# Altium PCB PCB1.PcbDoc
Units mm, origin at the board's own origin, x right, y up, seen from the top; angles counter-clockwise.
Board outline 90 x 120 mm, 2 copper layers (Top Layer, Bottom Layer); 34 components, 26 nets, 108 pads, 52 vias.
Unrouted connection lines stored in the file: 10.
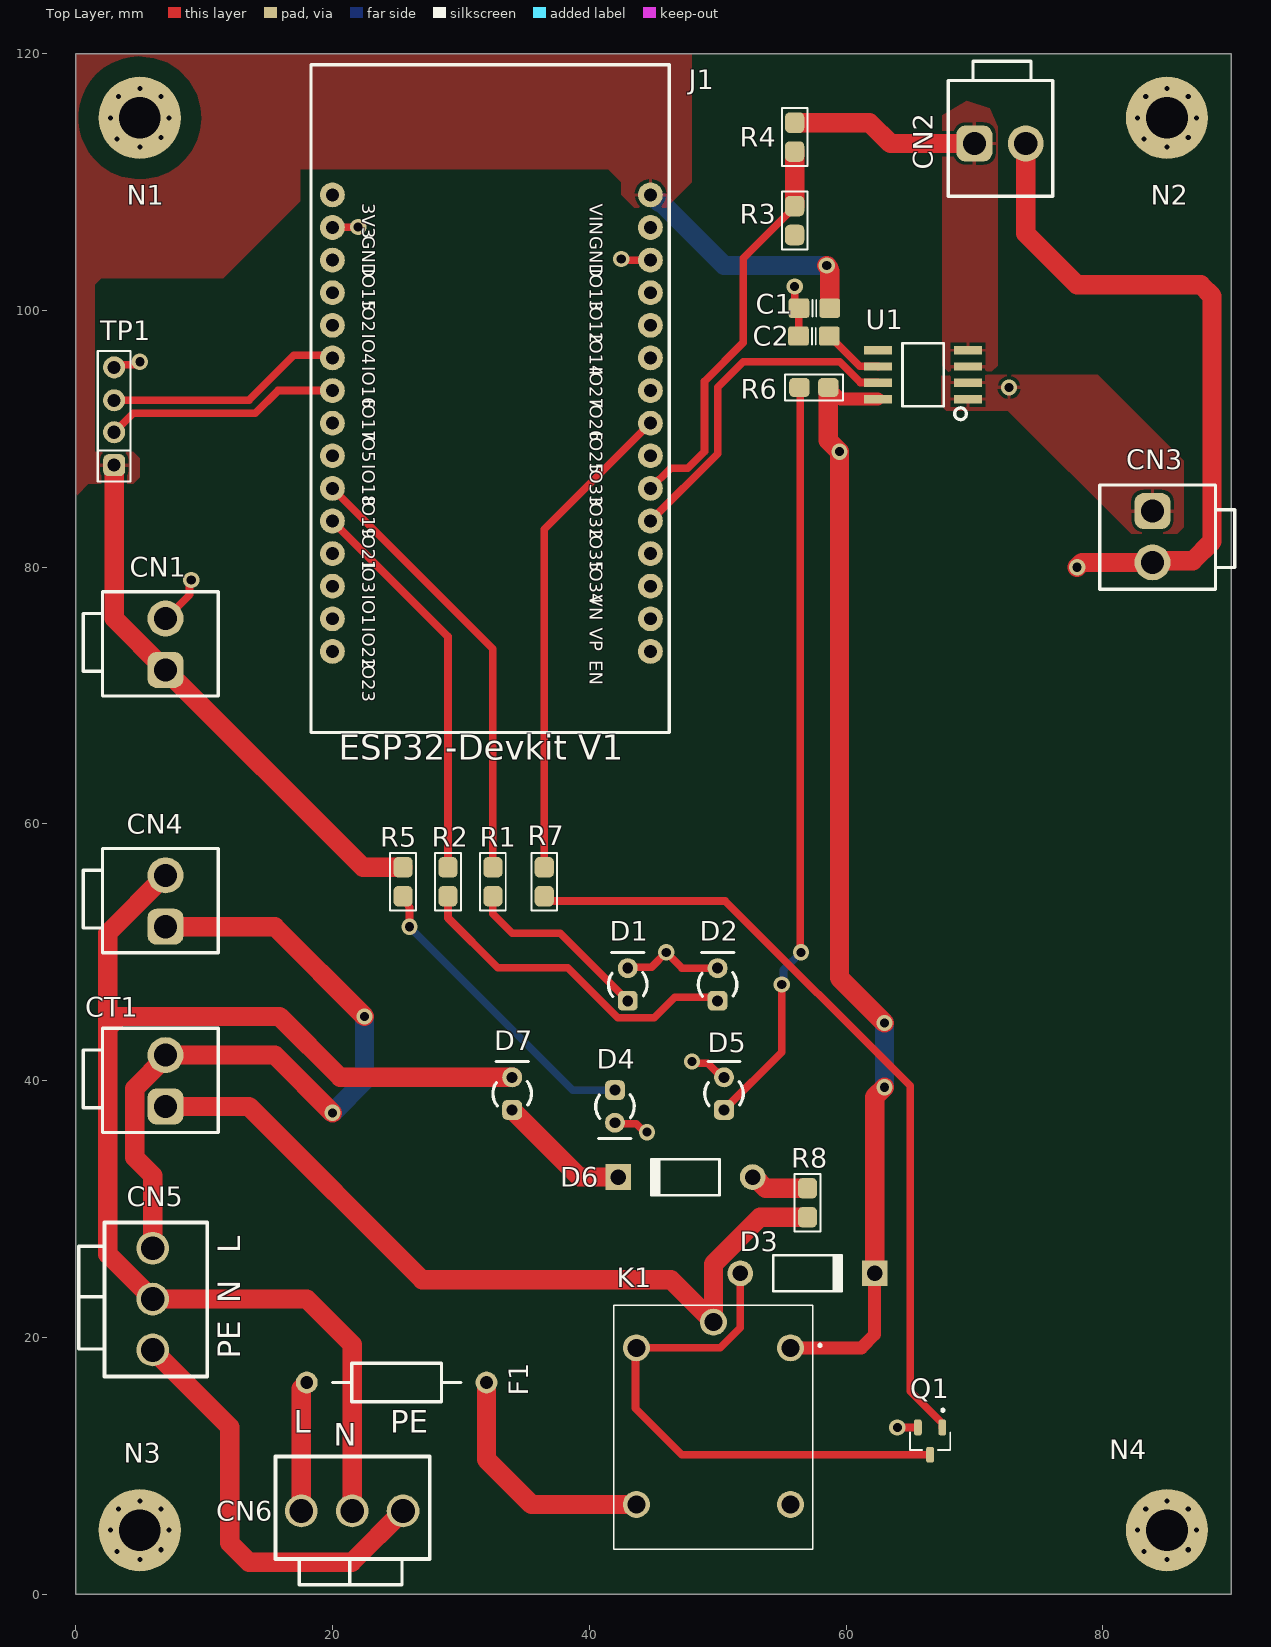
[diagram p0: Top Layer view]
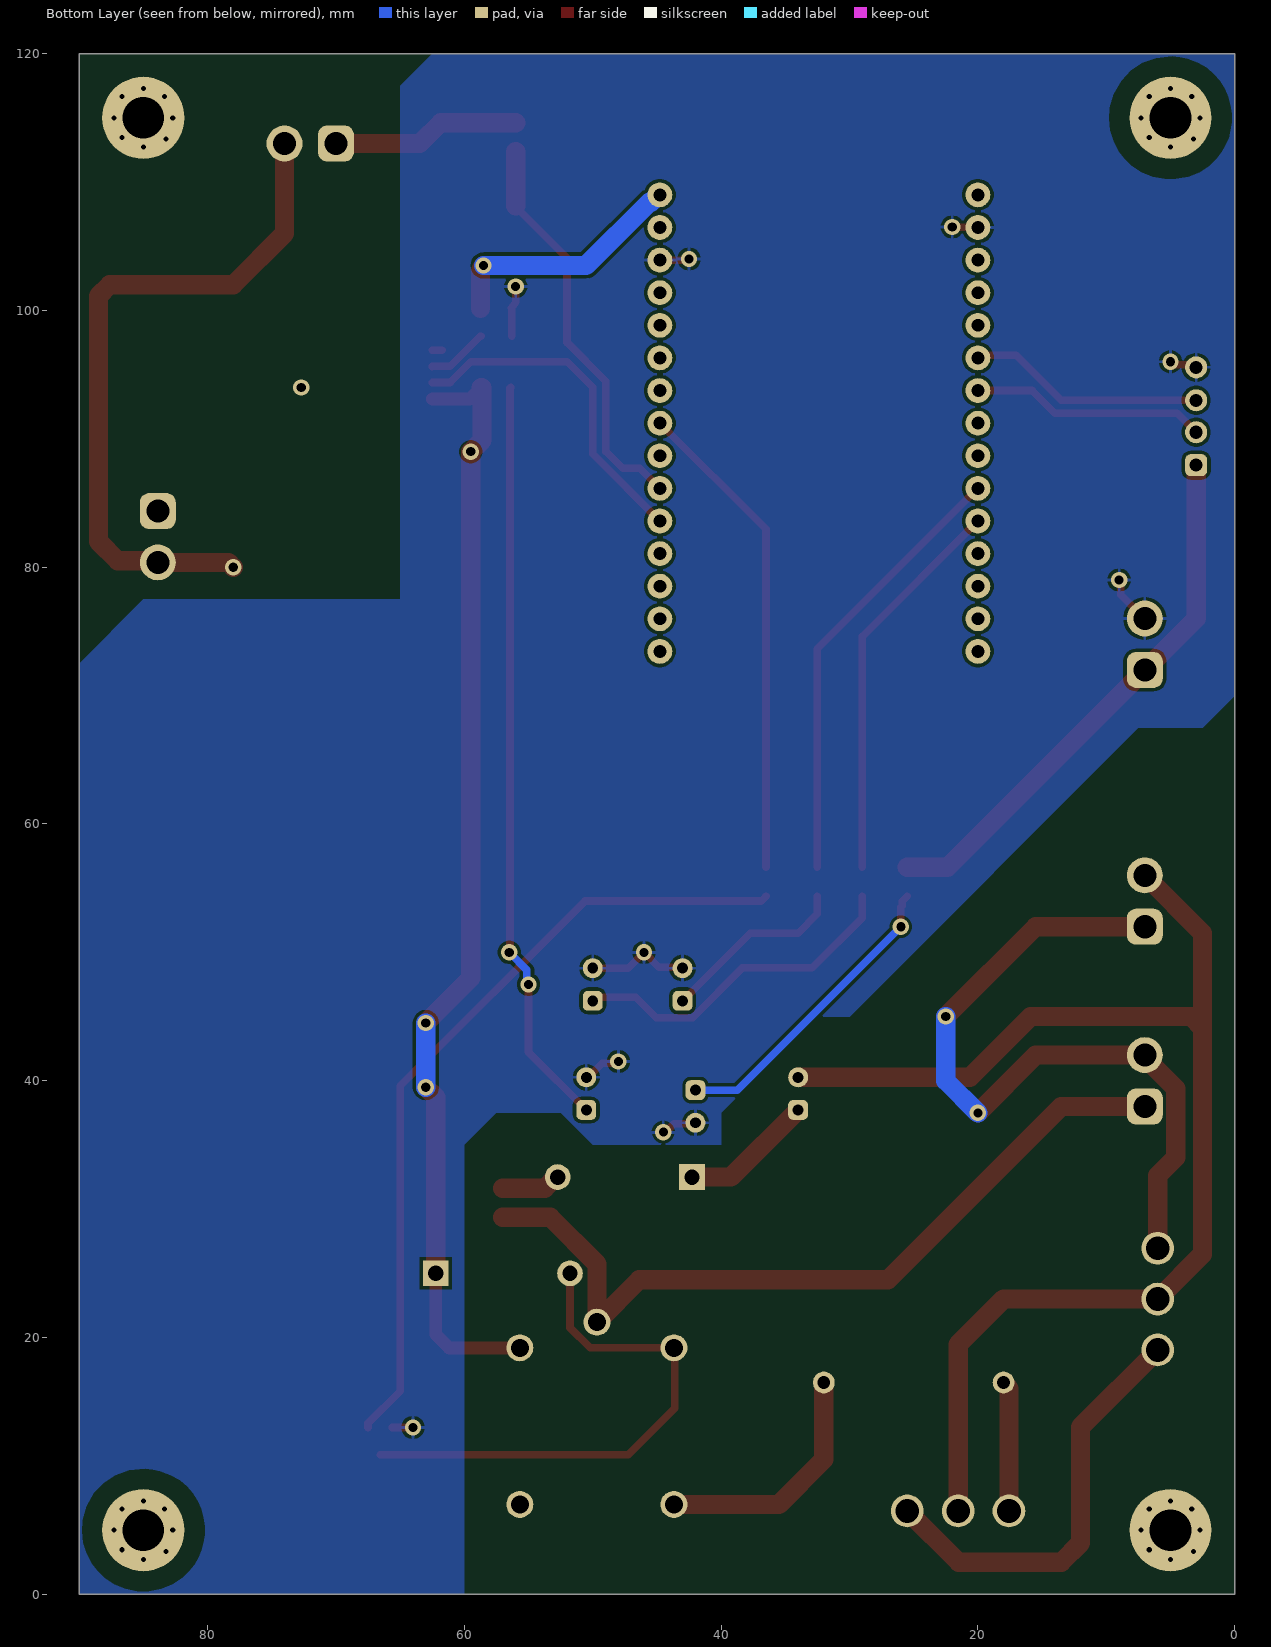
[diagram p1: Bottom Layer view, seen from below]

## Layer stack, top to bottom
Top Solder: solder mask 1, Solder Resist, Dk 3.5
Top Layer: signal copper 0.0356
Dielectric 1: dielectric 0.32, FR-4, Dk 4.8
Bottom Layer: signal copper 0.0356
Bottom Solder: solder mask 1, Solder Resist, Dk 3.5

## Board outline
0,0 90,0 90,120 0,120

## Design rules (kind name [scope] priority, off if disabled: settings)
Clearance [All] p1: gap=0.254 ignorepadtopadclearanceinfootprint=FALSE except(0: Arc-Hole Track-Hole SMDPad-Hole THPad-Hole Via-Hole Fill-Hole Poly-Hole Region-Hole Text-Hole)
Height [All] p1: minheight=0 maxheight=100 prefheight=12.7
PolygonConnect [All] p1: connectstyle=Relief reliefconductorwidth=0.254 reliefentries=4 polygonreliefangle="90 Angle" airgapwidth=0.254
RoutingVias [All] p1: holewidth=0.711 width=1.27 viastyle="Through Hole" minholewidth=0.711 minwidth=1.27 maxholewidth=0.711 maxwidth=1.27
SolderMaskExpansion [All] p1: expansion=0.102 istentingtop=FALSE
Width Width_1 [All] p1: maxlimit=1.5 minlimit=0.254 preferedwidth=0.254 minimp=50.000000 maximp=50.000000 favimp=50.000000
Width [All] p2: maxlimit=0.596 minlimit=0.555 preferedwidth=0.576
29 further rules are at their usual default settings.

## Components (designator, comment, footprint, x,y, rotation, side; value= is the part's Value field where it differs from the comment)
C1 "100n" CAPC2012X135N 57.538,100.177 r0 top
C2 "100n" CAPC2012X135N 57.5,98 r180 top
CN1 "V_SUPPLY" "Header 2 pin molex" 7,72 r90 top
CN2 "V_BAT_OUT" "Header 2 pin molex" 70,113 r0 top
CN3 "V_BAT_IN" "Header 2 pin molex" 83.873,84.373 r270 top
CN4 "PZEM_DATA" "Header 2 pin molex" 7,52 r90 top
CN5 "EMER BOARD" "CON 3P 3.8mm" 6,26.96 r270 top
CN6 "Connector" "CON 3P 3.8mm" 17.58,6.499 r0 top
CT1 "CT" "Header 2 pin molex" 7,38 r90 top
D1 "LED" "LED GREEN" 43,47.5 r0 top
D2 "LED" "LED GREEN" 50,47.5 r0 top
D3 "Diode 1N4007" DO-41 57,25 r0 top
D4 "LED" "LED GREEN" 42,38 r180 top
D5 "LED" "LED GREEN" 50.5,39 r0 top
D6 "Diode 1N4007" DO-41 47.5,32.5 r180 top
D7 "LED_AC" "LED ORANGE" 34,39 r0 top
F1 "36FG(L)R" "Micro Fuse - L14mm" 25,16.5 r0 top value="1A, 250Vac"
J1 "ESP32DEVKITV1" ESP32-DEVKITV1_3D 33.54,86.13 r270 top
K1 "HRS4-S_DC6V" HRS4SDC5V 50,13 r270 top
N1 "M3" "M3 hole" 5,115 r0 top
N2 "M3" "M3 hole" 85,115 r0 top
N3 "M3" "M3 hole" 5,5 r0 top
N4 "M3" "M3 hole" 85,5 r0 top
Q1 "MMBT2222ALT1G" SOT95P237X111-3N 66.55,11.94 r270 top
R1 "220" "0805 Modificado" 32.5,55.5 r270 top
R2 "220" "0805 MODIFICADO" 29,55.5 r270 top
R3 "7K5" "0805 MODIFICADO" 56,107 r270 top
R4 "30K" "0805 MODIFICADO" 56,113.5 r270 top
R5 "220" "0805 MODIFICADO" 25.5,55.5 r90 top
R6 "100K" "0805 Modificado" 57.5,94 r180 top
R7 "5k" "0805 MODIFICADO" 36.5,55.5 r270 top
R8 "56k" "0805 MODIFICADO" 57,30.5 r90 top
TP1 "TEST" "1x4P Test PIN" 3,90.485 r90 top
U1 "ACS712ELCTR-05B-T" SOIC127P600X175-8N 66,95 r180 top

## Footprints (in the part's own frame and the unit in brackets; to place one, negate y for a bottom-side part, rotate by r counter-clockwise, add the part's x,y. Pads: shape width x height; smd on the part's side, far side on the other; paste and mask are expansions set on the pad)
"1x4P Test PIN" [mm] "Connector Header, Single-row 4-position, 0.100\" pitch"
  rrect50% 1.72x1.72 hole 1.02: 1(-2.54,0)
  round 1.72 hole 1.02: 2(0.025,0) 3(2.515,0) 4(5.08,0)
  silkscreen extent -3.81,-1.27 6.35,1.27, body extent -3.69,-1.15 6.23,1.15, height 5
"0805 Modificado" [mm] "Chip Resistor, Empaque 0805"
  rrect50% 1.6x1.5 smd: 1(-1.125,0) 2(1.125,0)
  silkscreen extent -2.25,-1 2.25,1, body extent -1,-0.62 1,0.62, height 0.78
"0805 MODIFICADO" [mm] "Chip Resistor, Empaque 0805"
  rrect50% 1.6x1.5 smd: 1(-1.125,0) 2(1.125,0)
  silkscreen extent -2.25,-1 2.25,1, body extent -1,-0.62 1,0.62, height 0.78
CAPC2012X135N [mm] "Chip Capacitor, Body 2.0x1.2mm, EIA 0805, IPC Medium Density"
  round 0.254 on Mech15: 0(0,0)
  rrect25% 1.6x1.5 smd: 1(-1.2,0) 2(1.2,0)
  Top Layer pour cut-out: -0.675,0.7 -0.475,0.9 0.475,0.9 0.675,0.7 0.675,-0.7 0.475,-0.9 -0.475,-0.9 -0.675,-0.7
  silkscreen extent -0.15,-0.65 0.15,0.65, body extent -1.1,-0.72 1.1,0.73, height 1.34
"CON 3P 3.8mm" [mm]
  round 2.55 hole 1.85: 1(0,0) 2(3.96,0)
  round 2.55 hole 1.85 copper offset 0,0: 3(7.92,0.001)
  silkscreen extent -2,-5.76 10,4.25, body extent -1.86,-5.5 9.9,4, height 14.4
DO-41 [mm] "Diode, Axial; Body 5.2 x 2.7 mm (LxDia. max), Lead Dia. 0.86 mm (max)"
  round 2 hole 1.2: 1(-5.23,0)
  rect 2x2 hole 1.2: 2(5.23,0)
  silkscreen extent -2.65,-1.4 2.75,1.4, body extent -5.51,-1.34 5.51,1.4, height 2.73
ESP32-DEVKITV1_3D [mm]
  round 1.93 hole 1: 1(-22.87,-13.54) 2(-20.33,-13.54) 3(-17.79,-13.54) 4(-15.25,-13.54) 5(-12.71,-13.54) 6(-10.17,-13.54) 7(-7.63,-13.54) 8(-5.09,-13.54) 9(-2.55,-13.54) 10(-0.01,-13.54) 11(2.53,-13.54) 12(5.07,-13.54) 13(7.61,-13.54) 14(10.15,-13.54) 15(12.69,-13.54) 16(12.69,11.23) 17(10.15,11.23) 18(7.61,11.23) 19(5.07,11.23) 20(2.53,11.23) 21(-0.01,11.23) 22(-2.55,11.23) 23(-5.09,11.23) 24(-7.63,11.23) 25(-10.17,11.23) 26(-12.71,11.23) 27(-15.25,11.23) 28(-17.79,11.23) 29(-20.33,11.23) 30(-22.87,11.23)
  silkscreen extent -33,-15.2 19,12.7, body extent -33,-15.14 17.93,13.36, height 12.75
"Header 2 pin molex" [mm]
  rrect50% 2.8x2.8 hole 1.8: 1(0,0)
  round 2.8 hole 1.8: 2(4,0)
  silkscreen extent -2.03,-4.11 6.1,6.4, body extent -1.9,-3.95 5.9,5.55, height 14.4
HRS4SDC5V [mm]
  round 2.1 hole 1.4: 1(-6.2,5.675) 2(6,5.675) 3(6,-6.325) 4(-6.2,-6.325) 5(-8.2,-0.325)
  silkscreen extent -9.5,-8.08 9.5,8.07, body extent -9.5,-8.08 9.5,7.42, height 16.1
"LED GREEN" [mm]
  round 1.55 hole 0.85: 1(0,1.27)
  rrect50% 1.55x1.55 hole 0.85: 2(0,-1.27)
  silkscreen extent -1.5,-0.94 1.5,2.5, body extent -1.65,-1.66 1.65,1.64, height 7.01
"LED ORANGE" [mm]
  round 1.55 hole 0.85: 1(0,1.27)
  rrect50% 1.55x1.55 hole 0.85: 2(0,-1.27)
  silkscreen extent -1.5,-0.94 1.5,2.5, body extent -1.64,-1.66 1.65,1.55, height 6.48
"M3 hole" [mm]
  round 6.4 hole 3.25 mask+1.5: M(0,0)
  Top Layer pour cut-out: -0.132,4.78 -0.737,4.724 -1.295,4.597 -2.108,4.293 -2.818,3.885 -3.378,3.404 -3.834,2.869 -4.229,2.248 -4.497,1.616 -4.674,0.984 -4.769,0.305 -4.769,-0.353 -4.674,-0.965 -4.521,-1.575 -4.267,-2.134 -3.962,-2.692 -3.569,-3.175 -3.023,-3.721 -2.261,-4.229 -1.397,-4.572 -0.406,-4.75 0.457,-4.75 1.372,-4.572 2.248,-4.229 3.01,-3.721 3.556,-3.175 4.013,-2.591 4.42,-1.803 4.674,-0.965 4.775,-0.076 4.724,0.787 4.42,1.854 3.81,2.896 3.048,3.708 2.159,4.293 1.092,4.648
  Bottom Layer pour cut-out: -0.132,4.78 -0.737,4.724 -1.295,4.597 -2.108,4.293 -2.818,3.885 -3.378,3.404 -3.834,2.869 -4.229,2.248 -4.497,1.616 -4.674,0.984 -4.769,0.305 -4.769,-0.353 -4.674,-0.965 -4.521,-1.575 -4.267,-2.134 -3.962,-2.692 -3.569,-3.175 -3.023,-3.721 -2.261,-4.229 -1.397,-4.572 -0.406,-4.75 0.457,-4.75 1.372,-4.572 2.248,-4.229 3.01,-3.721 3.556,-3.175 4.013,-2.591 4.42,-1.803 4.674,-0.965 4.775,-0.076 4.724,0.787 4.42,1.854 3.81,2.896 3.048,3.708 2.159,4.293 1.092,4.648
  body extent -2.81,-2.8 2.79,2.8, height 4.92
"Micro Fuse - L14mm" [mm]
  round 1.7 hole 1: 1(-7,0) 2(7,0)
  silkscreen extent -5,-1.5 5,1.5, body extent -6.8,-1.9 6.8,1.9, height 3.9
SOIC127P600X175-8N [mm]
  rect 2.2x0.65 smd: 1(-3.5,1.905) 2(-3.5,0.635) 3(-3.5,-0.635) 4(-3.5,-1.905) 5(3.5,-1.905) 6(3.5,-0.635) 7(3.5,0.635) 8(3.5,1.905)
  silkscreen extent -3.38,-2.45 1.6,3.51, body extent -3,-2.45 3,2.45, height 1.75
SOT95P237X111-3N [mm]
  rrect50% 1.23x0.6 smd: 1(-1.06,0.95) 2(-1.06,-0.95) 3(1.06,0)
  silkscreen extent -2.5,-1.56 0.7,1.56, body extent -1.2,-1.45 1.2,1.45, height 0.91

## Part data
CN1 CN2 CN3 CN4 CT1: library part "Header LIGHT", "Connector 3.96MM 02 PIN WAFER STRAIGHTPIN (MALE)"
CN5 CN6: library part "Con 112002ST/RH 3.96mm 2P V-PLUG_1", "Connector 3.9mm. 3PINS WAFER STRAIGHT PIN (MALE)", Manufacturer=GTK, MPN=112002ST/RH, RMPN=RMELCCNT006, ComponentLink1Description="ES LINK", ComponentLink1URL=https://www.es.co.th/detail.asp?Prod=000709322, ESPN=0007-0932-2, M DESC="WAFER Connector 2 Pins,Pitch 3.96mm, Straight Type", RM DESC="Connector 3.9mm. 2PINS WAFER STRAIGHT PIN (MALE)"
D1 D2 D4 D5: library part "LED GREEN", "LED Lamp Round 5 mm, 50 mcd,Green Color Green Diffused Lens"
D3 D6: library part "Diode 1N4001", "1 Amp General Purpose Rectifier", Code_JEDEC=DO-204-AL, ComponentLink1Description="Manufacturer Link", ComponentLink1URL=http://www.fairchildsemi.com/, ComponentLink2Description=Datasheet, ComponentLink2URL=http://www.fairchildsemi.com/ds/1N%2F1N4001.pdf, DatasheetVersion=1998, LatestRevisionDate=17-Jul-2002, LatestRevisionNote="Re-released for DXP Platform.", PackageDescription="Diode, Axial; Body 5.2 x 2.7 mm (LxDia. max), Lead Dia. 0.86 mm (max)", PackageReference=DO-41, PackageVersion=Aug-1999, Published=8-Jun-2000, Publisher="Altium Limited"
D7: library part "LED ORANGE", "LED ORANGE for AC-signal display"
F1: library part "Fuse 36FG(L)R 1A On pcb", "Fuse Microfuse, 1A/250Vac, Fast Acting (Normal Blow) P/N : 36FG(L)R (SLEEK)", Manufacturer=SLEEK, RMPN=RMELCFUSA001, ComponentLink1Description="Link ES", ComponentLink1URL=https://www.es.co.th/detail.asp?prod=056200010, ComponentLink2Description=Datasheet, ComponentLink2URL=https://www.es.co.th/Schemetic/PDF/36FG-SLEEK.PDF, ESPN=0562-0001-0, MPN=36FG(L)R, Published=14-May-2014, Publisher="Cynetik Group", Revised="Zion Blue", RM DESC="Fuse หางหนู Microfuse, 1A/250Vac, Fast Acting (Normal Blow) P/N : 36FG(L)R (SLEEK)"
J1: "Dual core, Wi-Fi: 2.4 GHz up to 150 Mbits/s,BLE (Bluetooth Low Energy) and legacy Bluetooth, 32 bits, Up to 240 MHz", Package=Package, Availability=Unavailable, Check_prices=https://www.snapeda.com/parts/ESP32%20DEVKIT%20V1/Do%20it/view-part/5659245/?ref=eda, MF="Do it", MP="ESP32 DEVKIT V1", Price=None, SnapEDA_Link=https://www.snapeda.com/parts/ESP32%20DEVKIT%20V1/Do%20it/view-part/5659245/?ref=snap
K1: library part HRS4-S_DC5V, "Relay or Contactor", Manufacturer_Name=MULTICOMP, Manufacturer_Part_Number="HRS4-S DC5V", Datasheet Link=http://www.farnell.com/datasheets/1306711.pdf, Height=16mm
N1 N2 N3 N4: library part "M3 hole", "น็อต JT หัวร่ม สกรูมิลสี่แฉก M3x6", RMPN=RMRMANUTCJTZ011
Q1: "Bipolar (BJT) Transistor NPN 40 V 600 mA 300MHz 225 mW Surface Mount SOT-23-3 (TO-236)", Package="SOT-23-3 ON Semiconductor", Availability="In Stock", Check_prices=https://www.snapeda.com/parts/MMBT2222ALT1G/Onsemi/view-part/?ref=eda, MF="ON Semiconductor", MP=MMBT2222ALT1G, Price=None, Purchase-URL=https://pricing.snapeda.com/search/part/MMBT2222ALT1G/?ref=eda, SnapEDA_Link=https://www.snapeda.com/parts/MMBT2222ALT1G/Onsemi/view-part/?ref=snap
R3 R4 R8: library part 5k
R6: library part "Resistor 0805 SMD 4K7 OHM +/- 1% (CHIP)", "'RES SMD 4.7K OHM 1% 1/8W 0805/0805W8F4701T5E"
TP1: library part "PIN Header 1X4", "Connector Pin Header 4 Pins,Pitch 2.54mm. P/N : PHSS04G10/RH (GTK)", ComponentLink1Description="Link ES", ComponentLink1URL=https://www.es.co.th/detail.asp?Prod=000703471, ComponentLink2Description=Datasheet, ComponentLink2URL=https://www.es.co.th/Schemetic/PDF/PHSSXXG10.PDF
U1: "Current Sensor 5A 1 Channel Hall Effect, Open Loop Bidirectional 8-SOIC (0.154, 3.90mm Width)", Package="SOIC-8 Allegro MicroSystems LLC", Availability="In Stock", Check_prices=https://www.snapeda.com/parts/ACS712ELCTR-05B-T/Allegro+MicroSystems+LLC/view-part/?ref=eda, MF="Allegro MicroSystems LLC", MP=ACS712ELCTR-05B-T, Price=None, Purchase-URL=https://pricing.snapeda.com/search/part/ACS712ELCTR-05B-T/?ref=eda, SnapEDA_Link=https://www.snapeda.com/parts/ACS712ELCTR-05B-T/Allegro+MicroSystems+LLC/view-part/?ref=snap
R1 R2 R5: LatestRevisionDate=17-Jul-2002, LatestRevisionNote="Re-released for DXP Platform.", PackageReference=AXIAL-0.3, Published=8-Jun-2000, Publisher="Altium Limited"

## Via types
v1: diameter 0.8, hole 0.4, Top Layer to Bottom Layer, 32 vias
v2: diameter 1.27, hole 0.711, Top Layer to Bottom Layer, 20 vias

## Nets (pads, with @x,y where several pads share a name; then routed paths per layer and width w, separated by ;. In a path a pad name is that pad's centre, name@x,y a point inside that pad or via, vN(x,y) a via of type N, cw(c..) or ccw(c..) an arc to the next point about the centre after c; other vN are vias at no path point)
5: C1.2 CN1.1 D3.2 J1.30 K1.1 R5.2 R6.1 TP1.1 U1.8 | length 149
  Top Layer w1: K1.1 61.2,19.2 62.23,20.23 D3.2 ; R6.1@58.675,94 59.58,93.095 U1.8
  Top Layer w1.5: TP1.1 3,76 CN1.1 22.375,56.625 R5.2 ; v2(58.5,103.5) cw(c57.926,102.926) 58.738,102.926 C1.2 ; R6.1@58.675,94 R6.1 58.625,89.875 v2(59.5,89) 59.5,48 v2(63,44.5) ; D3.2 62.23,38.73 v2(63,39.5)
  Bottom Layer w1.5: J1.30 44.886,109 45.457,108.429 45.586,108.429 50.515,103.5 v2(58.5,103.5) ; v2(63,39.5) v2(63,44.5)
"AC LINE INPUT": F1.2 K1.3 | length 19.1
  Top Layer w1.5: F1.2 32,10.5 35.5,7 K1.3
"AC LINE OUTPUT": CN4.1 CN5.1 CT1.2 | length 58.5
  Top Layer w1.5: CN5.1 6,32.623 4.596,34.027 4.596,39.406 7,41.81 CT1.2@7,41.905 ; CT1.2 CT1.2@7,41.905 ; CN4.1 15.5,52 v2(22.5,45) ; v2(20,37.5) 15.5,42 7.095,42 CT1.2@7,41.905
  Bottom Layer w1.5: v2(20,37.5) 22.5,40 v2(22.5,45)
"AC NEUTRAL INPUT": CN4.2 CN5.2 CN6.2 D7.1 | length 100.1
  Top Layer w1.5: CN4.2 2.5,51.5 2.5,44.121 ; CN6.2 21.54,19.46 18,23 CN5.2 2.5,26.5 2.5,44.121 ; D7.1 20.608,40.27 15.878,45 3.379,45 2.5,44.121
CURRENT_SENSOR: J1.20 U1.7 | length 26.6
  Top Layer w0.596: J1.20 50,88.83 50,94 52,96 59.5,96 61.108,94.392 62.473,94.392 U1.7
GND: C1.1 C2.2 CN1.2 CN2.2 CN3.2 D1.1 D2.1 D4.1 D5.1 J1.2 J1.28 Q1.2 R3.2 TP1.4 U1.5 | length 84.5
  Top Layer w0.596: TP1.4 3.215,95.78 4.598,95.78 4.818,96 v2(5,96) ; CN1.2 8.871,77.871 8.871,78.871 v2(9,79) ; J1.2 20.02,106.48 21.98,106.48 v2(22,106.5) ; D4.1 42.081,36.649 43.669,36.649 44.318,36 v2(44.5,36) ; v2(42.5,104) 42.58,103.92 J1.28 ; D1.1 43.081,48.851 44.851,48.851 v2(46,50) 47.23,48.77 D2.1 ; v2(48,41.5) 48.129,41.371 49.241,41.371 50.342,40.27 D5.1 ; v2(56,101.861) 56,100.629 C1.1 56.319,100.159 56.319,98.019 C2.2 ; U1.5@61.725,96.905 U1.5 ; v2(64,13) Q1.2
  Top Layer w1.5: CN2.2 74,106 78,102 87.621,102 88.5,101.121 88.5,82 87,80.5 84,80.5 CN3.2 78.373,80.373 v2(78,80)
IP+: CN3.1 U1.1 U1.2
  other v2: 72.7,94
IP-: CN2.1 R4.1 U1.3 U1.4 | length 14.7
  Top Layer w1.5: R4.1 61.838,114.625 63.462,113 CN2.1
"IV LED": J1.11 R2.1 | length 30.7
  Top Layer w0.596: J1.11 29,74.6 R2.1
NetC2_1: C2.1 U1.6 | length 4.8
  Top Layer w0.596: C2.1 58.75,98 61.088,95.662 62.473,95.662 U1.6
NetCN6_1: CN6.1 F1.1 | length 10.2
  Top Layer w1.5: CN6.1 17.58,16.026 18,16.446 F1.1
NetCT1_1: CT1.1 K1.5 R8.1 | length 63
  Top Layer w1.5: CT1.1 13.5,38 27,24.5 46.375,24.5 K1.5 49.675,25.739 53.311,29.375 R8.1
NetD1_2: D1.2 R1.2 | length 14.7
  Top Layer w0.596: R1.2 32.5,53 34,51.5 37.73,51.5 D1.2
NetD2_2: D2.2 R2.2 | length 26.7
  Top Layer w0.596: R2.2 29,52.681 32.889,48.792 38.334,48.792 42.223,44.903 45.063,44.903 46.66,46.5 49.73,46.5 D2.2
NetD3_1: D3.1 K1.4 Q1.3 | length 42.2
  Top Layer w0.596: D3.1 51.77,20.77 50.2,19.2 K1.4 43.6,19.125 43.6,14.5 47.22,10.88 Q1.3
NetD4_2: D4.2 R5.1 | length 23.9
  Top Layer w0.596: R5.1 25.904,53.971 25.904,53.625 26,53.529 v2(26,52)
  Bottom Layer w0.596: v2(26,52) 38.73,39.27 D4.2
NetD5_2: D5.2 R6.2 | length 58.8
  Top Layer w0.596: D5.2 55,42.23 v2(55,47.5) ; R6.2 56.437,93.938 56.437,50.062 v2(56.5,50)
  Bottom Layer w0.596: v2(55,47.5) 55.129,47.629 55.129,48.629 v2(56.5,50)
NetD6_1: D6.1 R8.2 | length 4.6
  Top Layer w1.5: D6.1 52.865,32.5 53.74,31.625 R8.2
NetD6_2: D6.2 D7.2 | length 10.4
  Top Layer w1.5: D7.2 39.23,32.5 D6.2
NetQ1_1: Q1.1 R7.2 | length 62.3
  Top Layer w0.596: R7.2 36.875,54 50.6,54 65,39.6 65,15.815 67.5,13.315 Q1.1
PE: CN5.3 CN6.3 | length 33.3
  Top Layer w1.5: CN5.3 12,13.041 12,4 13.5,2.5 21.5,2.5 CN6.3
RELAY_CONTROL: J1.23 R7.1 | length 38
  Top Layer w0.596: R7.1 36.5,82.95 J1.23
RX_PZEM: J1.6 TP1.3 | length 18.5
  Top Layer w0.596: TP1.3 13.5,93 17,96.5 19.8,96.5 J1.6
TX_PZEM: J1.7 TP1.2 | length 18.3
  Top Layer w0.596: TP1.2 4.489,92 14,92 15.76,93.76 J1.7
VOLTAGE_SENSOR: J1.21 R3.1 R4.2 | length 31.7
  Top Layer w0.596: J1.21 46.336,87.706 47.674,87.706 48.984,89.016 48.984,94.484 52,97.5 52,104.075 56,108.075 R3.1
  Top Layer w1.5: R3.1 R4.2
WIFI_LED: J1.10 R1.1 | length 34.7
  Top Layer w0.596: J1.10 32.5,73.64 R1.1
pads on no net: C1.0 C2.0 J1.1 J1.3 J1.4 J1.5 J1.8 J1.9 J1.12 J1.13 J1.14 J1.15 J1.16 J1.17 J1.18 J1.19 J1.22 J1.24 J1.25 J1.26 J1.27 J1.29 K1.2 N1.M N2.M N3.M N4.M
copper on no net:
  other v1: 5,2.714 85,2.714 3.222,3.349 83.222,3.349 6.651,3.476 86.651,3.476 2.714,5 7.286,5 82.714,5 87.286,5 3.349,6.651 6.651,6.651 83.349,6.651 86.651,6.651 5,7.286 85,7.286 5,112.714 85,112.714 3.222,113.349 83.222,113.349 6.651,113.476 86.651,113.476 2.714,115 7.286,115 82.714,115 87.286,115 3.349,116.651 6.651,116.651 83.349,116.651 86.651,116.651 5,117.286 85,117.286

## Polygon pours and split planes (outlines as drawn)
5 on Top Layer "5_L01_P007" (solid, pour order 7): 0,85.5 1,86.5 4.5,86.5 5,87 5,88.5 4.5,89 1.5,89 1.5,102 2,102.5 11.5,102.5 17.5,108.5 17.5,111 41.5,111 42.5,110 42.5,109 43.5,108 46,108 48,110 48,120 0,120
IP- on Top Layer "IP-_L01_P002" (solid, pour order 2): 71.3,95.2 71.8,95.7 71.8,114.3 71.203,115.732 69.417,116.328 67.5,115.2 67.5,95.7 67.9,95.3 67.9,95.2
IP+ on Top Layer "IP+_L01_P001" (solid, pour order 1): 67.4,94.9 67.4,92.6 67.8,92.2 72.6,92.2 82.2,82.6 85.8,82.6 86.3,83.1 86.3,88.3 79.6,95 68.5,95
GND on Bottom Layer "GND_L02_P005" (solid, pour order 5): 0,120 0,70 2.5,67.5 7.5,67.5 30,45 32.5,45 40,37.5 40,35 50,35 52.5,37.5 57.5,37.5 60,35 60,0 90,0 90,72.5 85,77.5 65,77.5 65,117.5 62.5,120

## Silkscreen, mask and mechanical layers (free items; w line width, h text height)
Mechanical 1:
  the board outline again, w0.254

## Text inside footprints (layer, text, board x,y; h text height)
CN5: Top Overlay "PE" at 13.4,18.36 h3 r90; Top Overlay "N" at 13.4,22.66 h3 r90; Top Overlay "L" at 13.4,26.56 h3 r90
CN6: Top Overlay "PE" at 24.5,12 h3; Top Overlay "N" at 21.88,13.899 h3 r180; Top Overlay "L" at 17,12 h3
J1: Top Overlay "3V3" at 22.34,108.34 h1.02 r270; Top Overlay "GND" at 22.34,105.8 h1.02 r270; Top Overlay "IO15" at 22.34,103.26 h1.02 r270; Top Overlay "IO2" at 22.34,100.72 h1.02 r270; Top Overlay "IO4" at 22.34,98.18 h1.02 r270; Top Overlay "IO16" at 22.34,95.64 h1.02 r270; Top Overlay "IO17" at 22.34,93.1 h1.02 r270; Top Overlay "IO5" at 22.34,90.56 h1.02 r270; Top Overlay "IO18" at 22.34,88.02 h1.02 r270; Top Overlay "IO19" at 22.34,85.48 h1.02 r270; Top Overlay "IO21" at 22.34,82.94 h1.02 r270; Top Overlay "IO3" at 22.34,80.4 h1.02 r270; Top Overlay "IO1" at 22.34,77.86 h1.02 r270; Top Overlay "IO22" at 22.34,75.32 h1.02 r270; Top Overlay "IO23" at 22.34,72.78 h1.02 r270; Top Overlay "VIN" at 40.06,108.32 h1.02 r270; Top Overlay "GND" at 40.06,105.78 h1.02 r270; Top Overlay "IO13" at 40.06,103.24 h1.02 r270; Top Overlay "IO12" at 40.06,100.7 h1.02 r270; Top Overlay "IO14" at 40.06,98.16 h1.02 r270; Top Overlay "IO27" at 40.06,95.62 h1.02 r270; Top Overlay "IO26" at 40.06,93.08 h1.02 r270; Top Overlay "IO25" at 40.06,90.54 h1.02 r270; Top Overlay "IO33" at 40.06,88 h1.02 r270; Top Overlay "IO32" at 40.06,85.46 h1.02 r270; Top Overlay "IO35" at 40.06,82.92 h1.02 r270; Top Overlay "IO34" at 40.06,80.38 h1.02 r270; Top Overlay "VN" at 40.06,77.84 h1.02 r270; Top Overlay "VP" at 40.06,75.3 h1.02 r270; Top Overlay "EN" at 40.06,72.76 h1.02 r270; Top Overlay "ESP32-Devkit V1" at 20.5,65 h1.93; Mechanical 13 "ESP32-DEVKITV1" at 16.3,81.13 h1.27 r270